# Altium PCB Gatorsynth_Sequencer.PcbDoc
Units mm, origin at the board's own origin, x right, y up, seen from the top; angles counter-clockwise.
Board outline 290 x 113.4 mm, 2 copper layers (Top Layer, Bottom Layer); 78 components, 298 nets, 402 pads, 0 vias.
Unrouted connection lines stored in the file: 252.
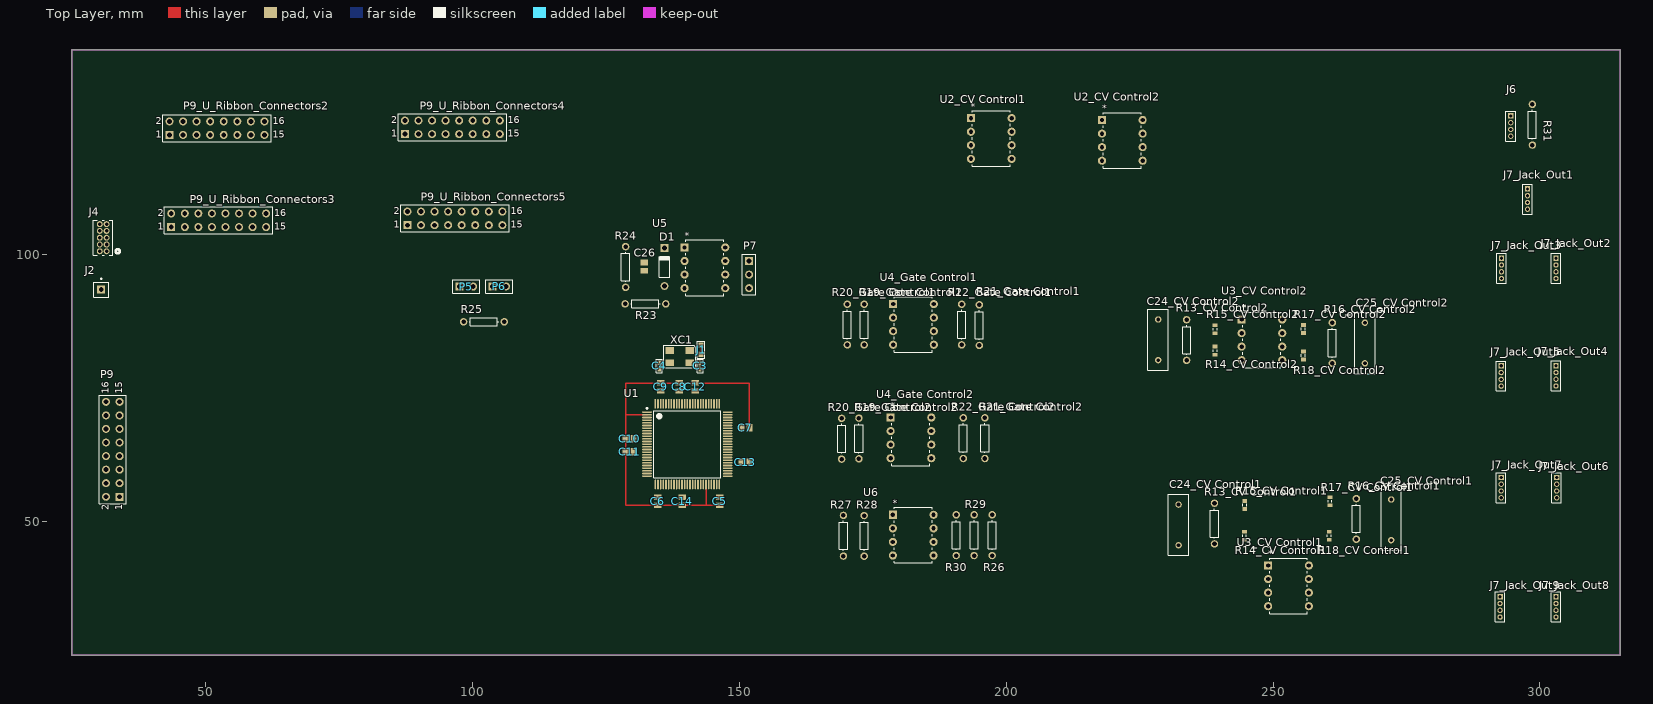
[diagram p0: Top Layer view]
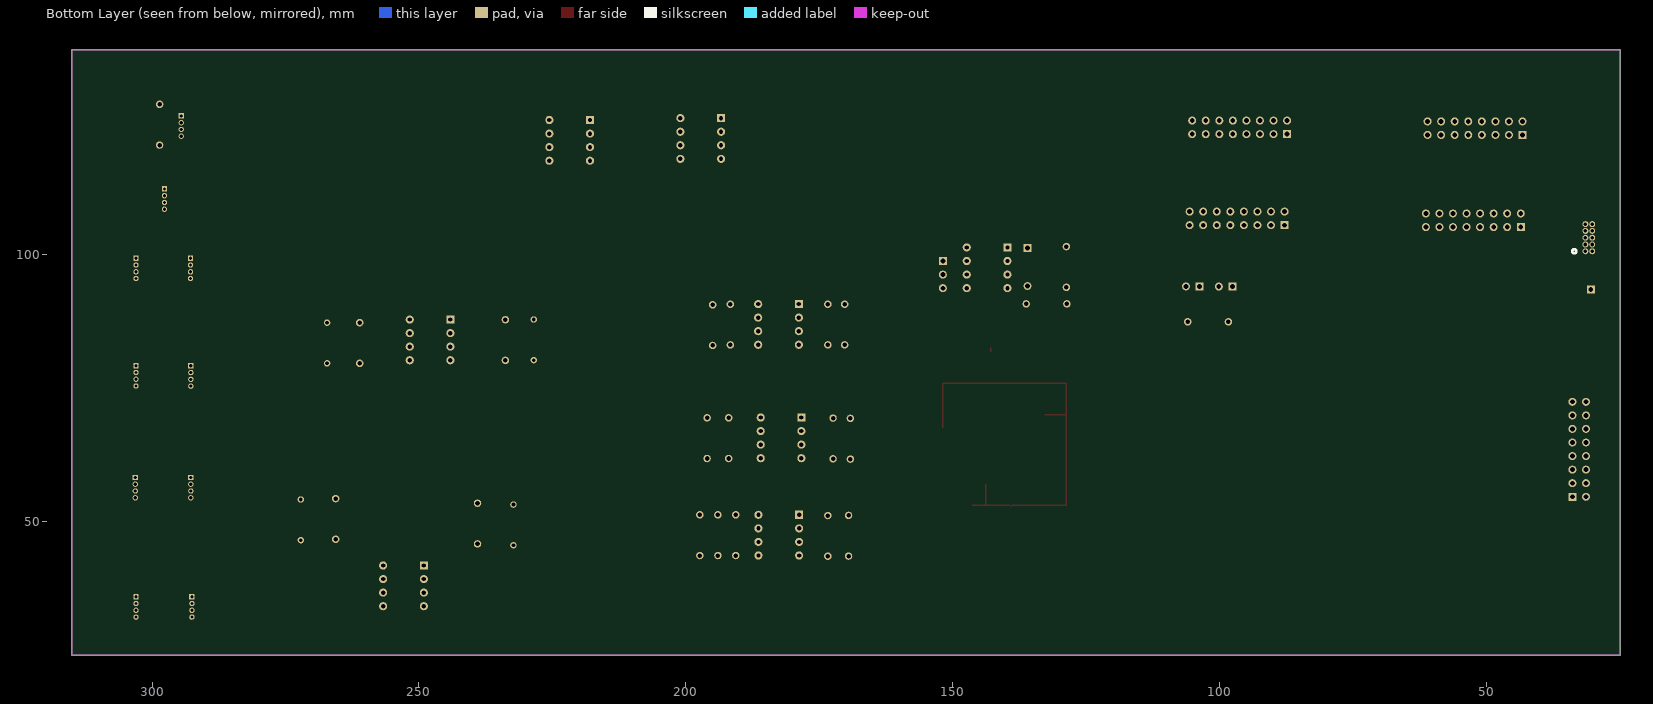
[diagram p1: Bottom Layer view, seen from below]

## Layer stack, top to bottom
Top Solder: solder mask 0.0102, Solder Resist, Dk 3.5
Top Layer: signal copper 0.0356
Dielectric 1: dielectric 0.32, FR-4, Dk 4.8
Bottom Layer: signal copper 0.0356
Bottom Solder: solder mask 0.0102, Solder Resist, Dk 3.5

## Board outline
25,25 25,138.4 315,138.4 315,25

## Design rules (kind name [scope] priority, off if disabled: settings)
Clearance Clearance_2 [All] p1: gap=0
Clearance [InPolygon] p2: gap=0.254
Clearance Clearance_1 [All] p3: gap=0.254
PolygonConnect [All] p1: connectstyle=Relief reliefconductorwidth=0.254 reliefentries=4 polygonreliefangle="90 Angle" airgapwidth=0.254
RoutingVias [All] p1: holewidth=0.711 width=1.27 viastyle="Through Hole" minholewidth=0.711 minwidth=1.27 maxholewidth=0.711 maxwidth=1.27
SolderMaskExpansion [All] p1: expansion=0.102
Width [All] p1: maxlimit=0.5 minlimit=0.254 preferedwidth=0.254
30 further rules are at their usual default settings.

## Classes and differential pairs
channel class Ribbon_Connectors: U_Ribbon_Connectors2 U_Ribbon_Connectors3 U_Ribbon_Connectors4 U_Ribbon_Connectors5
component class U_Ribbon_Connectors5: P9_U_Ribbon_Connectors5
component class U_Ribbon_Connectors4: P9_U_Ribbon_Connectors4
component class U_Ribbon_Connectors3: P9_U_Ribbon_Connectors3
component class U_Ribbon_Connectors2: P9_U_Ribbon_Connectors2
component class Top_Level: R25
component class "CV Control1": "C24_CV Control2" "C25_CV Control1" "R13_CV Control1" "R14_CV Control1" "R15_CV Control1" "R16_CV Control1" "R17_CV Control2" "R18_CV Control2" "U2_CV Control1" "U3_CV Control1"
component class "CV Control2": "C24_CV Control2" "C25_CV Control2" CV_Ctrl2 "R13_CV Control2" "R14_CV Control2" "R15_CV Control2" "R16_CV Control2" "R17_CV Control2" "R18_CV Control2" "U2_CV Control2" "U3_CV Control2"
component class Digital_Io: C26 D1 P7 R23 R24 R26 R27 R28 R29 R30 U5 U6
component class "Gate Control1": "R19_Gate Control1" "R20_Gate Control2" "R21_Gate Control1" "R22_Gate Control2" "U4_Gate Control1"
component class "Gate Control2": "R19_Gate Control2" "R20_Gate Control2" "R21_Gate Control2" "R22_Gate Control2" "U4_Gate Control2"
component class Jack_In: J6 R31
component class Jack_Out1: J7_Jack_Out1
component class Jack_Out2: J7_Jack_Out2
component class Jack_Out3: J7_Jack_Out3
component class Jack_Out4: J7_Jack_Out4
component class Jack_Out5: J7_Jack_Out5
component class Jack_Out6: J7_Jack_Out6
component class Jack_Out7: J7_Jack_Out7
component class Jack_Out8: J7_Jack_Out8
component class Jack_Out9: J7_Jack_Out9
component class Power: P9
component class Processor: C3 C4 C5 C6 C7 C8 C9 C10 C11 C12 C13 C14 J1 J2 P5 P6 U1 XC1
component class Programmer: J4
channel class CV_Control: "CV Control1" "CV Control2"
channel class Displays: U_Displays1 U_Displays2 U_Displays3 U_Displays4 U_Displays5 U_Displays6 U_Displays7 U_Displays8
channel class Encoders: "AUX Encoders1" "AUX Encoders2" "AUX Encoders3" "AUX Encoders4" "AUX Encoders5" "AUX Encoders6" "AUX Encoders7" "AUX Encoders8" "NOTE Encoders1" "NOTE Encoders2" "NOTE Encoders3" "NOTE Encoders4" "NOTE Encoders5" "NOTE Encoders6" "NOTE Encoders7" "NOTE Encoders8" "NOTE Encoders9" "NOTE Encoders10" "NOTE Encoders11" "NOTE Encoders12" "NOTE Encoders13" "NOTE Encoders14" "NOTE Encoders15" "NOTE Encoders16"
channel class Expanders: ButtonExpanders NoteExpanders
channel class Gate_Control: "Gate Control1" "Gate Control2"
channel class Jack_Out: Jack_Out1 Jack_Out2 Jack_Out3 Jack_Out4 Jack_Out5 Jack_Out6 Jack_Out7 Jack_Out8 Jack_Out9

## Components (designator, comment, footprint, x,y, rotation, side; value= is the part's Value field where it differs from the comment)
C3 "CAP-NONPOL" AP1-00001 142.675,79.2 r270 top
C4 "CAP-NONPOL" AP1-00001 135,79.2 r90 top
C5 "" C0805 146.35,53.85 r90 top
C6 "" C0805 134.75,53.85 r90 top
C7 "" C0805 151.15,67.625 r180 top
C8 "" C0805 138.775,75.3 r270 top
C9 "" C0805 135.275,75.3 r270 top
C10 "" C0805 129.475,65.55 r0 top
C11 "" C0805 129.475,63.125 r0 top
C12 "" C0805 141.775,75.3 r270 top
C13 "" C0805 151.15,61.125 r180 top
C14 "" C0805 139.35,53.85 r90 top
"C24_CV Control1" "Cap" RAD-0.3 232.3,49.425 r90 top (schematic designator C24)
"C24_CV Control2" "Cap" RAD-0.3 228.475,84.1 r270 top (schematic designator C24)
"C25_CV Control1" "Cap" RAD-0.3 272.125,50.375 r270 top (schematic designator C25)
"C25_CV Control2" "Cap" RAD-0.3 267.2,83.5 r270 top (schematic designator C25)
C26 "" C0805 132.179,97.798 r270 top
D1 "Diode 1N4148" DO-35 136,97.725 r90 top
J1 "SMD-STRAP_CLOSED" AP9-00044 142.85,82.225 r90 top net-tie
J2 "Erase_Socket" PIN1 30.475,93.5 r0 top
J4 "20021111-00010T4" CONN_MINITEK_2X5 30.85,103.225 r90 top
J6 "Phonejack3 RN" MHDR1X4 294.525,126.045 r270 top
J7_Jack_Out1 "Phonejack3 RN" MHDR1X4 297.675,112.37 r270 top (schematic designator J7)
J7_Jack_Out2 "Phonejack3 RN" MHDR1X4 303,99.38 r270 top (schematic designator J7)
J7_Jack_Out3 "Phonejack3 RN" MHDR1X4 292.775,99.38 r270 top (schematic designator J7)
J7_Jack_Out4 "Phonejack3 RN" MHDR1X4 303,79.255 r270 top (schematic designator J7)
J7_Jack_Out5 "Phonejack3 RN" MHDR1X4 292.725,79.23 r270 top (schematic designator J7)
J7_Jack_Out6 "Phonejack3 RN" MHDR1X4 303.125,58.32 r270 top (schematic designator J7)
J7_Jack_Out7 "Phonejack3 RN" MHDR1X4 292.725,58.32 r270 top (schematic designator J7)
J7_Jack_Out8 "Phonejack3 RN" MHDR1X4 303,35.965 r270 top (schematic designator J7)
J7_Jack_Out9 "Phonejack3 RN" MHDR1X4 292.525,35.97 r270 top (schematic designator J7)
P5 "Header 2" HDR1X2 97.625,94.075 r0 top
P6 "Header 2" HDR1X2 103.775,94.1 r0 top
P7 "Header 3" HDR1X3 151.854,98.848 r270 top
P9 "Header 8X2" HDR2X8 33.925,54.7 r90 top
P9_U_Ribbon_Connectors2 "Header 8X2" HDR2X8 43.275,122.475 r0 top (schematic designator P9)
P9_U_Ribbon_Connectors3 "Header 8X2" HDR2X8 43.6,105.225 r0 top (schematic designator P9)
P9_U_Ribbon_Connectors4 "Header 8X2" HDR2X8 87.375,122.625 r0 top (schematic designator P9)
P9_U_Ribbon_Connectors5 "Header 8X2" HDR2X8 87.85,105.575 r0 top (schematic designator P9)
"R13_CV Control1" "Res1" AXIAL-0.3 239.025,49.675 r90 top (schematic designator R13)
"R13_CV Control2" "Res1" AXIAL-0.3 233.8,84.05 r270 top (schematic designator R13)
"R14_CV Control1" "Res3" J1-0603 244.625,47.4 r270 top (schematic designator R14)
"R14_CV Control2" "Res3" J1-0603 239.15,82.075 r270 top (schematic designator R14)
"R15_CV Control1" "Res3" J1-0603 244.7,53.15 r270 top (schematic designator R15)
"R15_CV Control2" "Res3" J1-0603 239.15,86.1 r270 top (schematic designator R15)
"R16_CV Control1" "Res1" AXIAL-0.3 265.6,50.55 r270 top (schematic designator R16)
"R16_CV Control2" "Res1" AXIAL-0.3 261.1,83.5 r270 top (schematic designator R16)
"R17_CV Control1" "Res3" J1-0603 260.65,53.875 r270 top (schematic designator R17)
"R17_CV Control2" "Res3" J1-0603 255.675,86.125 r90 top (schematic designator R17)
"R18_CV Control1" "Res3" J1-0603 260.525,47.4 r270 top (schematic designator R18)
"R18_CV Control2" "Res3" J1-0603 255.675,81.15 r270 top (schematic designator R18)
"R19_Gate Control1" "Res1" AXIAL-0.3 173.4,86.95 r90 top (schematic designator R19)
"R19_Gate Control2" "Res1" AXIAL-0.3 172.429,65.623 r90 top (schematic designator R19)
"R20_Gate Control1" "Res1" AXIAL-0.3 170.25,86.95 r270 top (schematic designator R20)
"R20_Gate Control2" "Res1" AXIAL-0.3 169.179,65.573 r270 top (schematic designator R20)
"R21_Gate Control1" "Res1" AXIAL-0.3 194.975,86.85 r270 top (schematic designator R21)
"R21_Gate Control2" "Res1" AXIAL-0.3 196.029,65.673 r270 top (schematic designator R21)
"R22_Gate Control1" "Res1" AXIAL-0.3 191.675,86.95 r90 top (schematic designator R22)
"R22_Gate Control2" "Res1" AXIAL-0.3 191.979,65.673 r90 top (schematic designator R22)
R23 "Res1" AXIAL-0.3 132.429,90.823 r0 top
R24 "Res1" AXIAL-0.3 128.704,97.748 r270 top
R25 "R3" AXIAL-0.3 102.175,87.475 r0 top
R26 "Res1" AXIAL-0.3 197.375,47.5 r270 top
R27 "Res1" AXIAL-0.3 169.525,47.4 r270 top
R28 "Res1" AXIAL-0.3 173.4,47.375 r90 top
R29 "Res1" AXIAL-0.3 194,47.5 r270 top
R30 "Res1" AXIAL-0.3 190.65,47.5 r270 top
R31 "Res1" AXIAL-0.3 298.575,124.395 r90 top
U1 "ATSAM4N16CA-AU" LQFP100_N 140.275,64.55 r0 top net-tie
"U2_CV Control1" "LTC1661CN8#PBF" PDIP-8_N 201.025,118 r0 top (schematic designator U2)
"U2_CV Control2" "LTC1661CN8#PBF" PDIP-8_N 225.575,117.65 r0 top (schematic designator U2)
"U3_CV Control1" "LT1632CN8#PBF" PDIP-8_N 256.7,34.2 r0 top (schematic designator U3)
"U3_CV Control2" "LT1632CN8#PBF" PDIP-8_N 251.725,80.275 r0 top (schematic designator U3)
"U4_Gate Control1" "LT1632CN8#PBF" PDIP-8_N 186.45,83.175 r0 top (schematic designator U4)
"U4_Gate Control2" "LT1632CN8#PBF" PDIP-8_N 185.979,61.923 r0 top (schematic designator U4)
U5 "LT1632CN8#PBF" PDIP-8_N 147.379,93.783 r0 top
U6 "LT1632CN8#PBF" PDIP-8_N 186.4,43.7 r0 top
XC1 "12.0MHz" AP7-00039 138.85,80.95 r180 top

## Footprints (in the part's own frame and the unit in brackets; to place one, negate y for a bottom-side part, rotate by r counter-clockwise, add the part's x,y. Pads: shape width x height; smd on the part's side, far side on the other; paste and mask are expansions set on the pad)
AP1-00001 [mm]
  rect 0.9x0.6 smd: 1(-0.55,0) 2(0.55,0)
  silkscreen extent -1.25,-0.55 1.25,0.55, body extent -0.5,-0.3 0.5,0.3, height 0.2
AP7-00039 [mm]
  rect 1.6x1.3 smd: 1(-1.9,-1.15) 2(1.9,-1.15) 3(1.9,1.15) 4(-1.9,1.15)
  silkscreen extent -3,-2.1 3,2.1, body extent -2.7,-1.8 2.7,1.8, height 1.2
AP9-00044 [mm]
  rect 1x0.95 smd paste-1: 1(-0.85,0) 2(0.85,0)
  Top Layer region: -0.451,-0.15 0.449,-0.15 0.449,0.15 -0.451,0.15
  silkscreen extent -1.6,-0.72 1.6,0.72, body extent -0.8,-0.4 0.8,0.4, height 0.3
AXIAL-0.3 [mm] "Axial Device, Thru-Hole; 2 Leads; 0.3 in Pin Spacing"
  round 1.4 hole 0.85: 1(-3.81,0) 2(3.81,0)
  silkscreen extent -2.77,-0.76 2.77,0.76
C0805 [mm] "Chip Capacitor, Body 2.0x1.3mm, IPC High Density"
  rect 1.1x1.4 smd: 1(-0.75,0) 2(0.75,0)
  body extent -1.1,-0.72 1.1,0.72, height 1.4
CONN_MINITEK_2X5 [mil]
  round 44 / inner round 60 / far side round 44 hole 26: 1(-100,-25) 2(-100,25) 3(-50,-25) 4(-50,25) 5(0,-25) 6(0,25) 7(50,-25) 8(50,25) 9(100,-25) 10(100,25)
  silkscreen extent -130,-122 130,73, body extent 0,0 10,10, height 10
DO-35 [mm] "Diode, Axial; Body 3.8 x 1.9 mm (LxDia. max), Lead Dia. 0.53 mm (max)"
  round 1.5 hole 0.9: 1(-3.55,0)
  rect 1.5x1.5 hole 0.9: 2(3.55,0)
  silkscreen extent -1.95,-0.95 2.05,0.95
HDR1X2 [mm] "Connector; Header; 2 Position"
  rect 1.5x1.5 hole 0.9: 1(0,0)
  round 1.5 hole 0.9: 2(2.54,0)
  silkscreen extent -1.27,-1.27 3.81,1.27
HDR1X3 [mm] "Connector; Header; 3 Position"
  rect 1.5x1.5 hole 0.9: 1(0,0)
  round 1.5 hole 0.9: 2(2.54,0) 3(5.08,0)
  silkscreen extent -1.27,-1.27 6.35,1.27
HDR2X8 [mm] "Connector; Header; 8x2 Position"
  rect 1.5x1.5 hole 0.9: 1(0,0)
  round 1.5 hole 0.9: 2(0,2.54) 3(2.54,0) 4(2.54,2.54) 5(5.08,0) 6(5.08,2.54) 7(7.62,0) 8(7.62,2.54) 9(10.16,0) 10(10.16,2.54) 11(12.7,0) 12(12.7,2.54) 13(15.24,0) 14(15.24,2.54) 15(17.78,0) 16(17.78,2.54)
  silkscreen extent -1.27,-1.27 19.05,3.81
J1-0603 [mm] "Chip Resistor, Body 1.6x0.8mm, IPC High Density"
  rect 0.7x0.9 smd: 1(-0.75,0) 2(0.75,0)
  silkscreen extent -0.2,-0.35 0.2,0.35, body extent -0.85,-0.48 0.85,0.48, height 0.9
LQFP100_N [mm] "Thin QFP, 100-Leads, Body 14x14mm, Pitch 0.5mm, IPC Medium Density"
  oval 1.8x0.3 smd: 1(-7.55,6) 2(-7.55,5.5) 3(-7.55,5) 4(-7.55,4.5) 5(-7.55,4) 6(-7.55,3.5) 7(-7.55,3) 8(-7.55,2.5) 9(-7.55,2) 10(-7.55,1.5) 11(-7.55,1) 12(-7.55,0.5) 13(-7.55,0) 14(-7.55,-0.5) 15(-7.55,-1) 16(-7.55,-1.5) 17(-7.55,-2) 18(-7.55,-2.5) 19(-7.55,-3) 20(-7.55,-3.5) 21(-7.55,-4) 22(-7.55,-4.5) 23(-7.55,-5) 24(-7.55,-5.5) 25(-7.55,-6) 51(7.55,-6) 52(7.55,-5.5) 53(7.55,-5) 54(7.55,-4.5) 55(7.55,-4) 56(7.55,-3.5) 57(7.55,-3) 58(7.55,-2.5) 59(7.55,-2) 60(7.55,-1.5) 61(7.55,-1) 62(7.55,-0.5) 63(7.55,0) 64(7.55,0.5) 65(7.55,1) 66(7.55,1.5) 67(7.55,2) 68(7.55,2.5) 69(7.55,3) 70(7.55,3.5) 71(7.55,4) 72(7.55,4.5) 73(7.55,5) 74(7.55,5.5) 75(7.55,6)
  oval 0.3x1.8 smd: 26(-6,-7.55) 27(-5.5,-7.55) 28(-5,-7.55) 29(-4.5,-7.55) 30(-4,-7.55) 31(-3.5,-7.55) 32(-3,-7.55) 33(-2.5,-7.55) 34(-2,-7.55) 35(-1.5,-7.55) 36(-1,-7.55) 37(-0.5,-7.55) 38(0,-7.55) 39(0.5,-7.55) 40(1,-7.55) 41(1.5,-7.55) 42(2,-7.55) 43(2.5,-7.55) 44(3,-7.55) 45(3.5,-7.55) 46(4,-7.55) 47(4.5,-7.55) 48(5,-7.55) 49(5.5,-7.55) 50(6,-7.55) 76(6,7.55) 77(5.5,7.55) 78(5,7.55) 79(4.5,7.55) 80(4,7.55) 81(3.5,7.55) 82(3,7.55) 83(2.5,7.55) 84(2,7.55) 85(1.5,7.55) 86(1,7.55) 87(0.5,7.55) 88(0,7.55) 89(-0.5,7.55) 90(-1,7.55) 91(-1.5,7.55) 92(-2,7.55) 93(-2.5,7.55) 94(-3,7.55) 95(-3.5,7.55) 96(-4,7.55) 97(-4.5,7.55) 98(-5,7.55) 99(-5.5,7.55) 100(-6,7.55)
  silkscreen extent -7.67,-6.25 6.25,6.82, body extent -7,-7 7,7, height 1.6
MHDR1X4 [mm] "Connector; Header; 4 Position"
  rect 1x1 hole 0.6: 1(0,0)
  round 1 hole 0.6: 2(1.27,0) 3(2.54,0) 4(3.81,0)
  silkscreen extent -0.9,-0.9 4.71,0.9
PDIP-8_N [mil]
  rect 60x60 / inner round 60 / far side rect 60x60 hole 32 paste+0 mask+0: 1(-300,300)
  round 60 hole 32 paste+0 mask+0: 2(-300,200) 3(-300,100) 4(-300,0) 5(0,0) 6(0,100) 7(0,200) 8(0,300)
  silkscreen extent -290,-55 -10,355, body extent 0,0 10,10, height 10
PIN1 [mm] "Connector; Plug"
  rect 1.5x1.5 hole 0.9: 1(0,0)
  silkscreen extent -1.4,-1.4 1.4,2.17
RAD-0.3 [mm] "Radial Cap, Thru-Hole; 2 Leads; 0.3 in Pin Spacing"
  round 1.2 hole 0.7: 1(-3.81,0) 2(3.81,0)
  silkscreen extent -5.71,-1.91 5.71,1.91

## Part data
C3 C4: library part A01-0019, "Ceramic capacitor, SMD 0402, NP0, 50V, +/-5%"
C5 C6 C7 C8 C9 C10 C11 C12 C13 C14 C26: library part Cap, "Capacitor"
"C24_CV Control1" "C24_CV Control2" "C25_CV Control1" "C25_CV Control2": "Capacitor"
D1: "High Conductance Fast Diode"
J1: library part A09-0783, "Default closed SMD strap, 0603 size"
J2: library part Socket, "Socket"
J4 "U2_CV Control1" "U2_CV Control2" "U3_CV Control1" "U3_CV Control2" "U4_Gate Control1" "U4_Gate Control2" U5 U6: "Imported"
J6 J7_Jack_Out1 J7_Jack_Out2 J7_Jack_Out3 J7_Jack_Out4 J7_Jack_Out5 J7_Jack_Out6 J7_Jack_Out7 J7_Jack_Out8 J7_Jack_Out9: "Jack Socket, 1/4\" [6.5mm], Thru-Hole, Vertical, 3-Conductor with Tip open & Ring closed"
P5 P6: "Header, 2-Pin"
P7: "Header, 3-Pin"
P9 P9_U_Ribbon_Connectors2 P9_U_Ribbon_Connectors3 P9_U_Ribbon_Connectors4 P9_U_Ribbon_Connectors5: "Header, 8-Pin, Dual row"
"R13_CV Control1" "R13_CV Control2" "R14_CV Control1" "R14_CV Control2" "R15_CV Control1" "R15_CV Control2" "R16_CV Control1" "R16_CV Control2" "R17_CV Control1" "R17_CV Control2" "R18_CV Control1" "R18_CV Control2" "R19_Gate Control1" "R19_Gate Control2" "R20_Gate Control1" "R20_Gate Control2" "R21_Gate Control1" "R21_Gate Control2" "R22_Gate Control1" "R22_Gate Control2" R23 R24 R26 R27 R28 R29 R30 R31: "Resistor"
R25: library part Res1, "Resistor"
U1: library part ATSAM4S16CA-AU, "AT91 ARM Cortex-M4 32-bit Microcontroller, 1MB Flash, 128KB SRAM, USB, 79 User I/Os, 100-Pin LQFP, Industrial Grade (-40°C to 105°C), Pb-Free"
XC1: library part A07-0042, "Fox FQ5032B 12.0MHz SMD crystal 738B-12"

## Nets (pads, with @x,y where several pads share a name; then routed paths per layer and width w, separated by ;. In a path a pad name is that pad's centre, name@x,y a point inside that pad or via, vN(x,y) a via of type N, cw(c..) or ccw(c..) an arc to the next point about the centre after c; other vN are vias at no path point)
1.27V: C10.2 C11.2 C12.2 C13.2 C14.2 U1.11 U1.16 U1.36 U1.56 U1.85 U1.100
3.3V: C5.2 C6.2 C7.2 C8.2 C9.2 J4.1 U1.1 U1.10 U1.27 U1.50 U1.69 U1.91 U1.98 U5.8
5V: "R15_CV Control1.1" "R15_CV Control2.1" "R18_CV Control1.2" "R18_CV Control2.2" "U2_CV Control1.4" "U2_CV Control1.6" "U2_CV Control2.4" "U2_CV Control2.6" P9.5 P9.6
12V: "U3_CV Control1.8" "U3_CV Control2.8" "U4_Gate Control1.8" "U4_Gate Control2.8" P9.7 P9.8 U6.8
-12V: "U3_CV Control1.4" "U3_CV Control2.4" "U4_Gate Control1.4" "U4_Gate Control2.4" P9.15 P9.16 U6.4
AE_L0: P9_U_Ribbon_Connectors3.1 U1.74
AE_L1: P9_U_Ribbon_Connectors3.3 U1.52
AE_L2: P9_U_Ribbon_Connectors3.5 U1.48
AE_L3: P9_U_Ribbon_Connectors3.7 U1.28
AE_L4: P9_U_Ribbon_Connectors3.9 U1.24
AE_L5: P9_U_Ribbon_Connectors3.11 U1.20
AE_L6: P9_U_Ribbon_Connectors3.13 U1.34
AE_L7: P9_U_Ribbon_Connectors3.15 U1.39
AE_R0: P9_U_Ribbon_Connectors3.2 U1.72
AE_R1: P9_U_Ribbon_Connectors3.4 U1.49
AE_R2: P9_U_Ribbon_Connectors3.6 U1.46
AE_R3: P9_U_Ribbon_Connectors3.8 U1.12
AE_R4: P9_U_Ribbon_Connectors3.10 U1.15
AE_R5: P9_U_Ribbon_Connectors3.12 U1.22
AE_R6: P9_U_Ribbon_Connectors3.14 U1.38
AE_R7: P9_U_Ribbon_Connectors3.16 U1.57
AE_SW0: 
AE_SW1: 
AE_SW2: 
AE_SW3: 
AE_SW4: 
AE_SW5: 
AE_SW6: 
AE_SW7: 
BLU1: 
BLU2: 
BLU3: 
BLU4: 
BLU5: 
BLU6: 
BLU7: 
BLU8: 
BLU9: 
BLU10: 
BLU11: 
BLU12: 
BLU13: 
BLU14: 
BLU15: 
BLU16: 
BPM_IN: J6.1 U5.3
BPM_OUT: U1.41 U6.3
BPM_TRIG: C26.1 D1.2 R23.2 U1.53 U5.1
BTN_INT: P9_U_Ribbon_Connectors2.2 U1.88
"CLK OUT": J7_Jack_Out1.1 R27.2 U6.1
CS1: "U2_CV Control2.1" U1.93
CS2: "U2_CV Control1.1" U1.99
CV1: "C24_CV Control2.1" "R14_CV Control2.2" "U3_CV Control2.1" J7_Jack_Out3.1
CV2: "R16_CV Control2.1" "R17_CV Control2.1" "U3_CV Control2.7" J7_Jack_Out5.1
CV3: "C24_CV Control1.1" "R14_CV Control1.2" "U3_CV Control1.1" J7_Jack_Out7.1
CV4: "R16_CV Control1.1" "R17_CV Control1.1" "U3_CV Control1.7" J7_Jack_Out9.1
DISP_RESET: P9_U_Ribbon_Connectors2.11 U1.81
DISP_SEL0: P9_U_Ribbon_Connectors2.8 U1.59
DISP_SEL1: P9_U_Ribbon_Connectors2.9 U1.63
DISP_SEL2: P9_U_Ribbon_Connectors2.10 U1.64
ENC_INT: P9_U_Ribbon_Connectors2.1 U1.89
EXTRA_IN_ButtonExpanders: 
EXTRA_IN_NoteExpanders: 
GATE1: "R19_Gate Control1.2" "U4_Gate Control1.1" J7_Jack_Out2.1
GATE2: "R21_Gate Control1.1" "U4_Gate Control1.7" J7_Jack_Out4.1
GATE3: "R21_Gate Control2.1" "U4_Gate Control2.7" J7_Jack_Out6.1
GATE4: "R19_Gate Control2.2" "U4_Gate Control2.1" J7_Jack_Out8.1
GATE_OUT1: "U4_Gate Control1.3" U1.3
GATE_OUT2: "U4_Gate Control1.5" U1.5
GATE_OUT3: "U4_Gate Control2.3" U1.7
GATE_OUT4: "U4_Gate Control2.5" U1.9
GND: "C24_CV Control1.2" "C24_CV Control2.2" "C25_CV Control1.2" "C25_CV Control2.2" "R13_CV Control1.2" "R13_CV Control2.2" "R16_CV Control1.2" "R16_CV Control2.2" "R20_Gate Control1.1" "R20_Gate Control2.1" "R22_Gate Control1.2" "R22_Gate Control2.2" "U2_CV Control1.7" "U2_CV Control2.7" C3.2 C4.1 C5.1 C6.1 C7.1 C8.1 C9.1 C10.1 C11.1 C12.1 C13.1 C14.1 J4.3 J4.5 J4.9 J6.3 J7_Jack_Out1.3 J7_Jack_Out1.4 J7_Jack_Out2.3 J7_Jack_Out2.4 J7_Jack_Out3.3 J7_Jack_Out3.4 J7_Jack_Out4.3 J7_Jack_Out4.4 J7_Jack_Out5.3 J7_Jack_Out5.4 J7_Jack_Out6.3 J7_Jack_Out6.4 J7_Jack_Out7.3 J7_Jack_Out7.4 J7_Jack_Out8.3 J7_Jack_Out8.4 J7_Jack_Out9.3 J7_Jack_Out9.4 P9.9 P9.10 P9.11 P9.12 P9.13 P9.14 R24.1 R28.1 R30.1 U1.2 U1.26 U1.45 U1.70 U1.95 U5.4 | length 79.7
  Top Layer w0.254: C11.1 128.725,53.1 C6.1 138.9,53.1 C14.1@139.125,52.875 ; C11.1@128.75,63.15 128.75,70.05 ; U1.2 128.75,70.05 ; C14.1 C5.1 ; 143.775,53.1 U1.45 ; C7.1@151.875,67.65 151.875,76 128.75,76 128.75,70.05
GRN1: 
GRN2: 
GRN3: 
GRN4: 
GRN5: 
GRN6: 
GRN7: 
GRN8: 
GRN9: 
GRN10: 
GRN11: 
GRN12: 
GRN13: 
GRN14: 
GRN15: 
GRN16: 
JACK_INT: J6.4 R31.1 U1.44
MOSI: "U2_CV Control1.3" "U2_CV Control2.3" P9_U_Ribbon_Connectors2.5 U1.33
NE_L0: P9_U_Ribbon_Connectors5.1 U1.25
NE_L1: P9_U_Ribbon_Connectors5.3 U1.43
NE_L2: P9_U_Ribbon_Connectors5.5 U1.37
NE_L3: P9_U_Ribbon_Connectors5.7 U1.32
NE_L4: P9_U_Ribbon_Connectors5.9 U1.58
NE_L5: P9_U_Ribbon_Connectors5.11 U1.65
NE_L6: P9_U_Ribbon_Connectors5.13 U1.23
NE_L7: P9_U_Ribbon_Connectors5.15 U1.71
NE_L8: P9_U_Ribbon_Connectors4.1 U1.73
NE_L9: P9_U_Ribbon_Connectors4.3 U1.78
NE_L10: P9_U_Ribbon_Connectors4.5 U1.82
NE_L11: P9_U_Ribbon_Connectors4.7 U1.86
NE_L12: P9_U_Ribbon_Connectors4.9 U1.92
NE_L13: P9_U_Ribbon_Connectors4.11 U1.13
NE_L14: P9_U_Ribbon_Connectors4.13 U1.54
NE_L15: P9_U_Ribbon_Connectors4.15 U1.6
NE_R0: P9_U_Ribbon_Connectors5.2 U1.47
NE_R1: P9_U_Ribbon_Connectors5.4 U1.40
NE_R2: P9_U_Ribbon_Connectors5.6 U1.35
NE_R3: P9_U_Ribbon_Connectors5.8 U1.29
NE_R4: P9_U_Ribbon_Connectors5.10 U1.62
NE_R5: P9_U_Ribbon_Connectors5.12 U1.68
NE_R6: P9_U_Ribbon_Connectors5.14 U1.21
NE_R7: P9_U_Ribbon_Connectors5.16 U1.19
NE_R8: P9_U_Ribbon_Connectors4.2 U1.75
NE_R9: P9_U_Ribbon_Connectors4.4 U1.80
NE_R10: P9_U_Ribbon_Connectors4.6 U1.84
NE_R11: P9_U_Ribbon_Connectors4.8 U1.90
NE_R12: P9_U_Ribbon_Connectors4.10 U1.94
NE_R13: P9_U_Ribbon_Connectors4.12 U1.17
NE_R14: P9_U_Ribbon_Connectors4.14 U1.4
NE_R15: P9_U_Ribbon_Connectors4.16 U1.8
NE_SW0: 
NE_SW1: 
NE_SW2: 
NE_SW3: 
NE_SW4: 
NE_SW5: 
NE_SW6: 
NE_SW7: 
NE_SW8: 
NE_SW9: 
NE_SW10: 
NE_SW11: 
NE_SW12: 
NE_SW13: 
NE_SW14: 
NE_SW15: 
NetC3_1: C3.1 C4.2 J1.1 U1.96 U1.97 XC1.3
"NetC25_CV Control1_1": "C25_CV Control1.1" "R17_CV Control1.2" "R18_CV Control1.1" "U3_CV Control1.6"
"NetC25_CV Control2_1": "C25_CV Control2.1" "R17_CV Control2.2" "R18_CV Control2.1" "U3_CV Control2.6"
NetC26_2: C26.2 D1.1 R23.1 R24.2 U5.2
NetC27_1: 
NetC27_2: 
NetDRV1_1: 
NetDRV2_1: 
NetDRV3_1: 
NetDRV4_1: 
NetJ1_2: J1.2 XC1.1
NetJ2_1: J2.1 U1.87
NetJ4_2: J4.2 U1.79
NetJ4_4: J4.4 U1.83
NetJ4_6: J4.6 U1.76
NetJ4_8: J4.8 U1.51
NetJ4_10: J4.10 U1.60
NetP5_1: P5.1 P5.2 U1.30
NetP6_1: P6.1 U1.61
NetP6_2: P6.2 U1.77
NetP7_1: P7.1 U5.7
NetP7_2: P7.2 U5.6
NetP7_3: P7.3 U5.5
NetP9_U_Ribbon_Connectors1_1: 
NetP9_U_Ribbon_Connectors1_2: 
NetP9_U_Ribbon_Connectors1_3: 
NetP9_U_Ribbon_Connectors1_4: 
NetP9_U_Ribbon_Connectors1_5: 
NetP9_U_Ribbon_Connectors1_6: 
NetP9_U_Ribbon_Connectors1_7: 
NetP9_U_Ribbon_Connectors1_8: 
NetP9_U_Ribbon_Connectors1_9: 
NetP9_U_Ribbon_Connectors1_10: 
NetP9_U_Ribbon_Connectors1_11: 
NetP9_U_Ribbon_Connectors1_12: 
NetP9_U_Ribbon_Connectors1_13: 
NetP9_U_Ribbon_Connectors1_14: 
NetP9_U_Ribbon_Connectors1_15: 
NetP9_U_Ribbon_Connectors1_16: 
NetP9_U_Ribbon_Connectors2_14: P9_U_Ribbon_Connectors2.14
NetP9_U_Ribbon_Connectors2_15: P9_U_Ribbon_Connectors2.15
NetP9_U_Ribbon_Connectors2_16: P9_U_Ribbon_Connectors2.16
"NetR2_AUX Encoders1_1": 
"NetR2_AUX Encoders2_1": 
"NetR2_AUX Encoders3_1": 
"NetR2_AUX Encoders4_1": 
"NetR2_AUX Encoders5_1": 
"NetR2_AUX Encoders6_1": 
"NetR2_AUX Encoders7_1": 
"NetR2_AUX Encoders8_1": 
"NetR2_NOTE Encoders1_1": 
"NetR2_NOTE Encoders2_1": 
"NetR2_NOTE Encoders3_1": 
"NetR2_NOTE Encoders4_1": 
"NetR2_NOTE Encoders5_1": 
"NetR2_NOTE Encoders6_1": 
"NetR2_NOTE Encoders7_1": 
"NetR2_NOTE Encoders8_1": 
"NetR2_NOTE Encoders9_1": 
"NetR2_NOTE Encoders10_1": 
"NetR2_NOTE Encoders11_1": 
"NetR2_NOTE Encoders12_1": 
"NetR2_NOTE Encoders13_1": 
"NetR2_NOTE Encoders14_1": 
"NetR2_NOTE Encoders15_1": 
"NetR2_NOTE Encoders16_1": 
"NetR3_AUX Encoders1_1": 
"NetR3_AUX Encoders2_1": 
"NetR3_AUX Encoders3_1": 
"NetR3_AUX Encoders4_1": 
"NetR3_AUX Encoders5_1": 
"NetR3_AUX Encoders6_1": 
"NetR3_AUX Encoders7_1": 
"NetR3_AUX Encoders8_1": 
"NetR3_NOTE Encoders1_1": 
"NetR3_NOTE Encoders2_1": 
"NetR3_NOTE Encoders3_1": 
"NetR3_NOTE Encoders4_1": 
"NetR3_NOTE Encoders5_1": 
"NetR3_NOTE Encoders6_1": 
"NetR3_NOTE Encoders7_1": 
"NetR3_NOTE Encoders8_1": 
"NetR3_NOTE Encoders9_1": 
"NetR3_NOTE Encoders10_1": 
"NetR3_NOTE Encoders11_1": 
"NetR3_NOTE Encoders12_1": 
"NetR3_NOTE Encoders13_1": 
"NetR3_NOTE Encoders14_1": 
"NetR3_NOTE Encoders15_1": 
"NetR3_NOTE Encoders16_1": 
NetR4_3: U1.18
"NetR13_CV Control1_1": "R13_CV Control1.1" "R14_CV Control1.1" "R15_CV Control1.2" "U3_CV Control1.2"
"NetR13_CV Control2_1": "R13_CV Control2.1" "R14_CV Control2.1" "R15_CV Control2.2" "U3_CV Control2.2"
"NetR19_Gate Control1_1": "R19_Gate Control1.1" "R20_Gate Control1.2" "U4_Gate Control1.2"
"NetR19_Gate Control2_1": "R19_Gate Control2.1" "R20_Gate Control2.2" "U4_Gate Control2.2"
"NetR21_Gate Control1_2": "R21_Gate Control1.2" "R22_Gate Control1.1" "U4_Gate Control1.6"
"NetR21_Gate Control2_2": "R21_Gate Control2.2" "R22_Gate Control2.1" "U4_Gate Control2.6"
NetR26_1: R26.1 R29.1 U6.7
NetR27_1: R27.1 R28.2 U6.2
NetR29_2: R29.2 R30.2 U6.6
NetR32_1: 
NetU1_42: U1.42
NOTE_LEN: P9_U_Ribbon_Connectors2.7
PLAY/PAUSE_LED: U1.14 U6.5
PP_BTN: P9_U_Ribbon_Connectors2.12 R25.1 U1.67
PP_LED: P9_U_Ribbon_Connectors2.13 R26.2
RED1: 
RED2: 
RED3: 
RED4: 
RED5: 
RED6: 
RED7: 
RED8: 
RED9: 
RED10: 
RED11: 
RED12: 
RED13: 
RED14: 
RED15: 
RED16: 
SCKO1: 
SCKO2: 
SCKO3: 
SCL: P9_U_Ribbon_Connectors2.4 U1.55
SDA: P9_U_Ribbon_Connectors2.3 U1.66
SDA_DISP0: 
SDA_DISP1: 
SDA_DISP2: 
SDA_DISP3: 
SDA_DISP4: 
SDA_DISP5: 
SDA_DISP6: 
SDA_DISP7: 
SDTO1: 
SDTO2: 
SDTO3: 
SPCK: "U2_CV Control1.2" "U2_CV Control2.2" P9_U_Ribbon_Connectors2.6 U1.31
SW1: 
SW2: 
SW3: 
SW4: 
SW5: 
SW6: 
SW7: 
SW8: 
SW9: 
SW10: 
SW11: 
SW12: 
SW13: 
SW14: 
SW15: 
SW16: 
VCC: R25.2 R31.2
"VOUT_A_CV Control1": "U2_CV Control1.8" "U3_CV Control1.3"
"VOUT_A_CV Control2": "U2_CV Control2.8" "U3_CV Control2.3"
"VOUT_B_CV Control1": "U2_CV Control1.5" "U3_CV Control1.5"
"VOUT_B_CV Control2": "U2_CV Control2.5" "U3_CV Control2.5"
pads on no net: J4.7 J6.2 J7_Jack_Out1.2 J7_Jack_Out2.2 J7_Jack_Out3.2 J7_Jack_Out4.2 J7_Jack_Out5.2 J7_Jack_Out6.2 J7_Jack_Out7.2 J7_Jack_Out8.2 J7_Jack_Out9.2 P9.1 P9.2 P9.3 P9.4 XC1.2 XC1.4

## Keep-outs
Keep-Out Layer:
  the board outline again, w0.254

## Text inside footprints (layer, text, board x,y; h text height)
P9: Top Overlay "2" at 31.893,52.16 h1.27 r90; Top Overlay "1" at 34.433,52.16 h1.27 r90; Top Overlay "15" at 34.433,74.004 h1.27 r90; Top Overlay "16" at 31.893,74.004 h1.27 r90
P9_U_Ribbon_Connectors2: Top Overlay "16" at 62.579,124.507 h1.27; Top Overlay "15" at 62.579,121.967 h1.27; Top Overlay "1" at 40.735,121.967 h1.27; Top Overlay "2" at 40.735,124.507 h1.27
P9_U_Ribbon_Connectors3: Top Overlay "16" at 62.904,107.257 h1.27; Top Overlay "15" at 62.904,104.717 h1.27; Top Overlay "1" at 41.06,104.717 h1.27; Top Overlay "2" at 41.06,107.257 h1.27
P9_U_Ribbon_Connectors4: Top Overlay "16" at 106.679,124.657 h1.27; Top Overlay "15" at 106.679,122.117 h1.27; Top Overlay "1" at 84.835,122.117 h1.27; Top Overlay "2" at 84.835,124.657 h1.27
P9_U_Ribbon_Connectors5: Top Overlay "16" at 107.154,107.607 h1.27; Top Overlay "15" at 107.154,105.067 h1.27; Top Overlay "1" at 85.31,105.067 h1.27; Top Overlay "2" at 85.31,107.607 h1.27
"U2_CV Control1": Top Overlay "*" at 193.405,127.144 h1.27; Mechanical 13 "*" at 194.04,125.62 h1.27
"U2_CV Control2": Top Overlay "*" at 217.955,126.794 h1.27; Mechanical 13 "*" at 218.59,125.27 h1.27
"U3_CV Control1": Top Overlay "*" at 249.08,43.344 h1.27; Mechanical 13 "*" at 249.715,41.82 h1.27
"U3_CV Control2": Top Overlay "*" at 244.105,89.419 h1.27; Mechanical 13 "*" at 244.74,87.895 h1.27
"U4_Gate Control1": Top Overlay "*" at 178.83,92.319 h1.27; Mechanical 13 "*" at 179.465,90.795 h1.27
"U4_Gate Control2": Top Overlay "*" at 178.359,71.067 h1.27; Mechanical 13 "*" at 178.994,69.543 h1.27
U5: Top Overlay "*" at 139.759,102.927 h1.27; Mechanical 13 "*" at 140.394,101.403 h1.27
U6: Top Overlay "*" at 178.78,52.844 h1.27; Mechanical 13 "*" at 179.415,51.32 h1.27